# Altium PCB Test (2).PcbDoc (part 4 of 4)
Units mm, origin at the board's own origin, x right, y up, seen from the top; angles counter-clockwise.
Board outline 152.4 x 101.6 mm, 2 copper layers (Top Layer, Bottom Layer); 1 components, 0 nets, 300 pads, 1 vias.
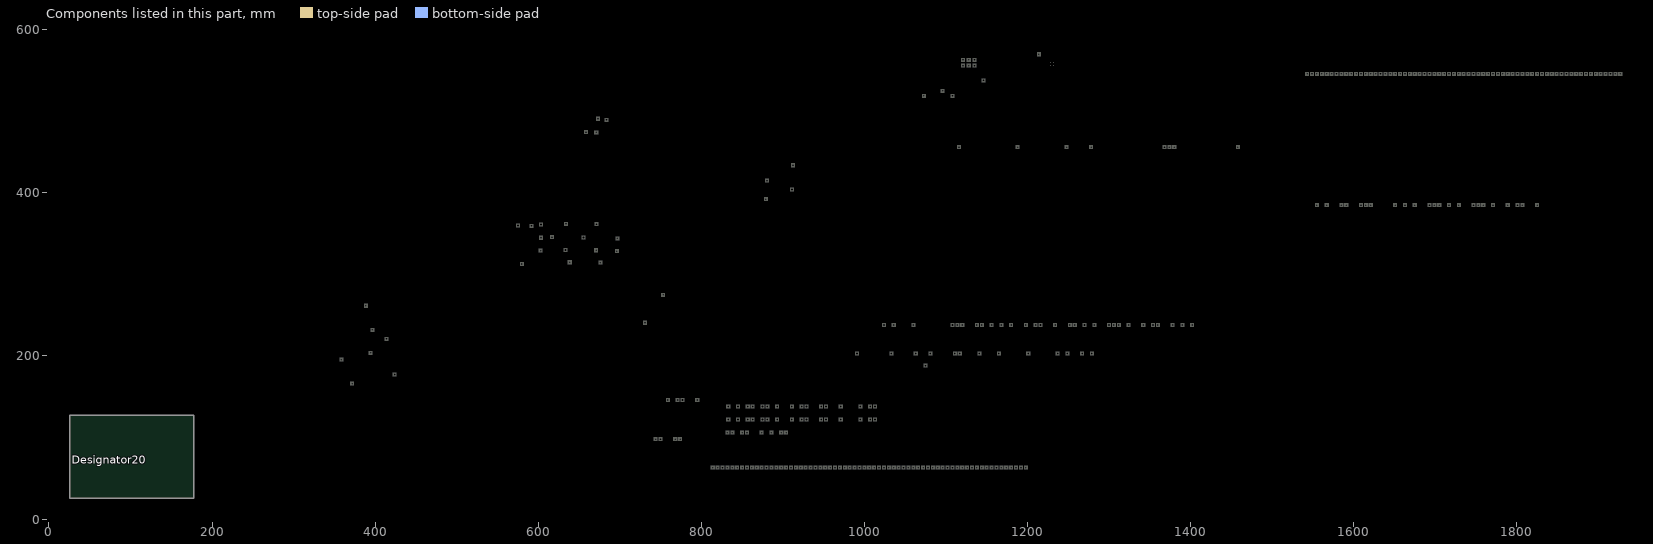
[diagram p4: the components of this part, seen from the top]

## Via types
v1: diameter 0.9, hole 0.4, Top Layer to Bottom Layer, 1 vias

## Nets (pads, with @x,y where several pads share a name; then routed paths per layer and width w, separated by ;. In a path a pad name is that pad's centre, name@x,y a point inside that pad or via, vN(x,y) a via of type N, cw(c..) or ccw(c..) an arc to the next point about the centre after c; other vN are vias at no path point) (continued)
copper on no net: (continued)
  Top Layer w0.2: 1310,203 ccw(c1309,203) 1310,203 ; 1314,300 ccw(c1313,300) 1314,300 ; 1315,351 ccw(c1314,351) 1315,351 ; 1315,456 ccw(c1314,456) 1315,456 ; 1316,203 ccw(c1315,203) 1316,203 ; 1319,238 ccw(c1318,238) 1319,238 ; 1320,300 ccw(c1319,300) 1320,300 ; 1321,351 ccw(c1320,351) 1321,351 ; 1321,456 ccw(c1320,456) 1321,456 ; 1326,300 ccw(c1325,300) 1326,300 ; 1327,351 ccw(c1326,351) 1327,351 ; 1327,456 ccw(c1326,456) 1327,456 ; 1331,238 ccw(c1330,238) 1331,238 ; 1332,300 ccw(c1331,300) 1332,300 ; 1333,351 ccw(c1332,351) 1333,351 ; 1333,456 ccw(c1332,456) 1333,456 ; 1337,238 ccw(c1336,238) 1337,238 ; 1338,300 ccw(c1337,300) 1338,300 ; 1339,351 ccw(c1338,351) 1339,351 ; 1339,456 ccw(c1338,456) 1339,456 ; 1344,300 ccw(c1343,300) 1344,300 ; 1345,351 ccw(c1344,351) 1345,351 ; 1345,456 ccw(c1344,456) 1345,456 ; 1349,238 ccw(c1348,238) 1349,238 ; 1350,300 ccw(c1349,300) 1350,300 ; 1351,351 ccw(c1350,351) 1351,351 ; 1351,456 ccw(c1350,456) 1351,456 ; 1356,300 ccw(c1355,300) 1356,300 ; 1357,351 ccw(c1356,351) 1357,351 ; 1357,456 ccw(c1356,456) 1357,456 ; 1362,300 ccw(c1361,300) 1362,300 ; 1363,351 ccw(c1362,351) 1363,351 ; 1363,456 ccw(c1362,456) 1363,456 ; 1367,238 ccw(c1366,238) 1367,238 ; 1368,300 ccw(c1367,300) 1368,300 ; 1369,351 ccw(c1368,351) 1369,351 ; 1373,238 ccw(c1372,238) 1373,238 ; 1374,300 ccw(c1373,300) 1374,300 ; 1375,351 ccw(c1374,351) 1375,351 ; 1380,300 ccw(c1379,300) 1380,300 ; 1381,351 ccw(c1380,351) 1381,351 ; 1385,238 ccw(c1384,238) 1385,238 ; 1386,300 ccw(c1385,300) 1386,300 ; 1387,351 ccw(c1386,351) 1387,351 ; 1387,456 ccw(c1386,456) 1387,456 ; 1392,300 ccw(c1391,300) 1392,300 ; 1393,351 ccw(c1392,351) 1393,351 ; 1393,456 ccw(c1392,456) 1393,456 ; 1397,238 ccw(c1396,238) 1397,238 ; 1398,300 ccw(c1397,300) 1398,300 ; 1399,456 ccw(c1398,456) 1399,456 ; 1404,300 ccw(c1403,300) 1404,300 ; 1405,456 ccw(c1404,456) 1405,456 ; 1410,300 ccw(c1409,300) 1410,300 ; 1411,456 ccw(c1410,456) 1411,456 ; 1416,300 ccw(c1415,300) 1416,300 ; 1417,456 ccw(c1416,456) 1417,456 ; 1422,300 ccw(c1421,300) 1422,300 ; 1423,456 ccw(c1422,456) 1423,456 ; 1428,300 ccw(c1427,300) 1428,300 ; 1429,456 ccw(c1428,456) 1429,456 ; 1434,300 ccw(c1433,300) 1434,300 ; 1435,456 ccw(c1434,456) 1435,456 ; 1441,456 ccw(c1440,456) 1441,456 ; 1447,456 ccw(c1446,456) 1447,456 ; 1448,385 ccw(c1447,385) 1448,385 ; 1453,456 ccw(c1452,456) 1453,456 ; 1454,385 ccw(c1453,385) 1454,385 ; 1465,456 ccw(c1464,456) 1465,456 ; 1471,456 ccw(c1470,456) 1471,456 ; 1472,385 ccw(c1471,385) 1472,385 ; 1477,456 ccw(c1476,456) 1477,456 ; 1478,385 ccw(c1477,385) 1478,385 ; 1483,456 ccw(c1482,456) 1483,456 ; 1484,385 ccw(c1483,385) 1484,385 ; 1489,456 ccw(c1488,456) 1489,456 ; 1490,385 ccw(c1489,385) 1490,385 ; 1495,456 ccw(c1494,456) 1495,456 ; 1496,385 ccw(c1495,385) 1496,385 ; 1501,456 ccw(c1500,456) 1501,456 ; 1502,385 ccw(c1501,385) 1502,385 ; 1508,385 ccw(c1507,385) 1508,385 ; 1514,385 ccw(c1513,385) 1514,385 ; 1520,385 ccw(c1519,385) 1520,385 ; 1526,385 ccw(c1525,385) 1526,385 ; 1532,385 ccw(c1531,385) 1532,385 ; 1538,385 ccw(c1537,385) 1538,385 ; 1544,385 ccw(c1543,385) 1544,385 ; 1550,385 ccw(c1549,385) 1550,385 ; 1562,385 ccw(c1561,385) 1562,385 ; 1574,385 ccw(c1573,385) 1574,385 ; 1580,385 ccw(c1579,385) 1580,385 ; 1598,385 ccw(c1597,385) 1598,385 ; 1604,385 ccw(c1603,385) 1604,385 ; 1628,385 ccw(c1627,385) 1628,385 ; 1634,385 ccw(c1633,385) 1634,385 ; 1640,385 ccw(c1639,385) 1640,385 ; 1646,385 ccw(c1645,385) 1646,385 ; 1658,385 ccw(c1657,385) 1658,385 ; 1670,385 ccw(c1669,385) 1670,385 ; 1682,385 ccw(c1681,385) 1682,385 ; 1688,385 ccw(c1687,385) 1688,385 ; 1712,385 ccw(c1711,385) 1712,385 ; 1724,385 ccw(c1723,385) 1724,385 ; 1736,385 ccw(c1735,385) 1736,385 ; 1742,385 ccw(c1741,385) 1742,385 ; 1766,385 ccw(c1765,385) 1766,385 ; 1778,385 ccw(c1777,385) 1778,385 ; 1784,385 ccw(c1783,385) 1784,385 ; 1796,385 ccw(c1795,385) 1796,385 ; 1814,385 ccw(c1813,385) 1814,385 ; 1820,385 ccw(c1819,385) 1820,385 ; 1832,385 ccw(c1831,385) 1832,385
  Top Layer w0.254: 2.54,0 ccw(c0,0) 2.54,0 ; 2.54,0 ccw(c0,0) 2.54,0 ; 2.54,0 ccw(c0,0) 2.54,0 ; 135.175,110.236 ccw(c130.175,110.236) 135.175,110.236 ; 135.175,110.236 ccw(c130.175,110.236) 135.175,110.236 ; 135.175,110.236 ccw(c130.175,110.236) 135.175,110.236 ; 135.175,110.236 ccw(c130.175,110.236) 135.175,110.236 ; 135.175,110.236 ccw(c130.175,110.236) 135.175,110.236 ; 135.175,110.236 ccw(c130.175,110.236) 135.175,110.236 ; 145.763,91.821 ccw(c135.763,91.821) 145.763,91.821 ; 145.763,91.821 ccw(c135.763,91.821) 145.763,91.821 ; 108.124,90.551 ccw(c103.124,90.551) 108.124,90.551 ; 111.934,103.251 ccw(c106.934,103.251) 111.934,103.251 ; 118.11,85.852 ccw(c115.57,85.852) 118.11,85.852 ; 120.189,93.98 ccw(c115.189,93.98) 120.189,93.98 ; 120.57,111.887 ccw(c115.57,111.887) 120.57,111.887 ; 121.158,72.39 ccw(c118.618,72.39) 121.158,72.39 ; 136.779,75.819 ccw(c134.239,75.819) 136.779,75.819 ; 150.86,191.643 ccw(c149.86,191.643) 150.86,191.643 ; 151.638,76.2 ccw(c149.098,76.2) 151.638,76.2 ; 156.829,156.591 ccw(c155.829,156.591) 156.829,156.591 ; 158.861,175.133 ccw(c157.861,175.133) 158.861,175.133 ; 170.545,153.162 ccw(c169.545,153.162) 170.545,153.162 ; 171.688,186.182 ccw(c170.688,186.182) 171.688,186.182 ; 171.925,97.917 ccw(c161.925,97.917) 171.925,97.917 ; 174.101,173.101 ccw(c173.101,173.101) 174.101,173.101 ; 184.134,182.118 ccw(c183.134,182.118) 184.134,182.118 ; 184.388,144.653 ccw(c183.388,144.653) 184.388,144.653 ; 184.515,164.211 ccw(c183.515,164.211) 184.515,164.211 ; 194.548,160.655 ccw(c193.548,160.655) 194.548,160.655 ; 196.326,144.018 ccw(c195.326,144.018) 196.326,144.018 ; 197.342,175.895 ccw(c196.342,175.895) 197.342,175.895 ; 204.962,156.464 ccw(c203.962,156.464) 204.962,156.464 ; 206.867,144.145 ccw(c205.867,144.145) 206.867,144.145 ; 206.867,172.593 ccw(c205.867,172.593) 206.867,172.593 ; 933.54,203 ccw(c931,203) 933.54,203 ; 939.54,203 ccw(c937,203) 939.54,203 ; 945.54,203 ccw(c943,203) 945.54,203 ; 963.54,188 ccw(c961,188) 963.54,188 ; 969.54,188 ccw(c967,188) 969.54,188 ; 975.54,188 ccw(c973,188) 975.54,188 ; 981.54,188 ccw(c979,188) 981.54,188 ; 987.54,188 ccw(c985,188) 987.54,188 ; 993.54,188 ccw(c991,188) 993.54,188 ; 999.54,188 ccw(c997,188) 999.54,188 ; 1005.54,188 ccw(c1003,188) 1005.54,188 ; 1011.54,188 ccw(c1009,188) 1011.54,188 ; 1017.54,188 ccw(c1015,188) 1017.54,188 ; 1023.54,188 ccw(c1021,188) 1023.54,188 ; 1029.54,188 ccw(c1027,188) 1029.54,188 ; 1035.54,188 ccw(c1033,188) 1035.54,188 ; 1041.54,188 ccw(c1039,188) 1041.54,188 ; 1047.54,188 ccw(c1045,188) 1047.54,188 ; 1053.54,188 ccw(c1051,188) 1053.54,188 ; 1059.54,188 ccw(c1057,188) 1059.54,188 ; 1065.54,188 ccw(c1063,188) 1065.54,188 ; 1071.54,188 ccw(c1069,188) 1071.54,188 ; 1077.54,188 ccw(c1075,188) 1077.54,188 ; 1083.54,188 ccw(c1081,188) 1083.54,188 ; 1089.54,188 ccw(c1087,188) 1089.54,188 ; 1095.54,188 ccw(c1093,188) 1095.54,188 ; 1101.54,188 ccw(c1099,188) 1101.54,188 ; 1107.54,188 ccw(c1105,188) 1107.54,188 ; 1113.54,188 ccw(c1111,188) 1113.54,188 ; 1119.54,188 ccw(c1117,188) 1119.54,188 ; 1125.54,188 ccw(c1123,188) 1125.54,188 ; 1131.54,188 ccw(c1129,188) 1131.54,188 ; 1137.54,188 ccw(c1135,188) 1137.54,188 ; 1143.54,188 ccw(c1141,188) 1143.54,188 ; 1149.54,188 ccw(c1147,188) 1149.54,188 ; 1155.54,188 ccw(c1153,188) 1155.54,188 ; 1161.54,188 ccw(c1159,188) 1161.54,188 ; 1167.54,188 ccw(c1165,188) 1167.54,188 ; 1173.54,188 ccw(c1171,188) 1173.54,188 ; 1179.54,188 ccw(c1177,188) 1179.54,188 ; 1185.54,188 ccw(c1183,188) 1185.54,188 ; 1191.54,188 ccw(c1189,188) 1191.54,188 ; 1197.54,188 ccw(c1195,188) 1197.54,188 ; 1203.54,188 ccw(c1201,188) 1203.54,188 ; 1209.54,188 ccw(c1207,188) 1209.54,188 ; 1215.54,188 ccw(c1213,188) 1215.54,188 ; 1221.54,188 ccw(c1219,188) 1221.54,188 ; 1227.54,188 ccw(c1225,188) 1227.54,188 ; 1233.54,188 ccw(c1231,188) 1233.54,188 ; 1239.54,188 ccw(c1237,188) 1239.54,188 ; 1245.54,188 ccw(c1243,188) 1245.54,188 ; 1251.54,188 ccw(c1249,188) 1251.54,188 ; 1257.54,188 ccw(c1255,188) 1257.54,188 ; 1263.54,188 ccw(c1261,188) 1263.54,188 ; 1269.54,188 ccw(c1267,188) 1269.54,188 ; 1275.54,188 ccw(c1273,188) 1275.54,188 ; 1281.54,188 ccw(c1279,188) 1281.54,188 ; 1287.54,188 ccw(c1285,188) 1287.54,188 ; 1293.54,188 ccw(c1291,188) 1293.54,188 ; 1299.54,188 ccw(c1297,188) 1299.54,188 ; 1305.54,188 ccw(c1303,188) 1305.54,188 ; 1311.54,188 ccw(c1309,188) 1311.54,188 ; 1317.54,188 ccw(c1315,188) 1317.54,188 ; 1323.54,188 ccw(c1321,188) 1323.54,188 ; 1329.54,188 ccw(c1327,188) 1329.54,188 ; 1335.54,188 ccw(c1333,188) 1335.54,188 ; 1341.54,188 ccw(c1339,188) 1341.54,188 ; 1347.54,188 ccw(c1345,188) 1347.54,188
  Top Layer w0.3: 78.359,105.664 86.233,105.664
  other v1: 75.692,72.644